# Altium PCB Snap4.PcbDoc
Units mil, origin at the board's own origin, x right, y up, seen from the top; angles counter-clockwise.
Board outline 4525 x 1525 mil, 4 copper layers (Top Layer, Internal Plane 1, Internal Plane 2, Bottom Layer), stack 30.634 mil thick; 67 components, 56 nets, 312 pads, 87 vias.
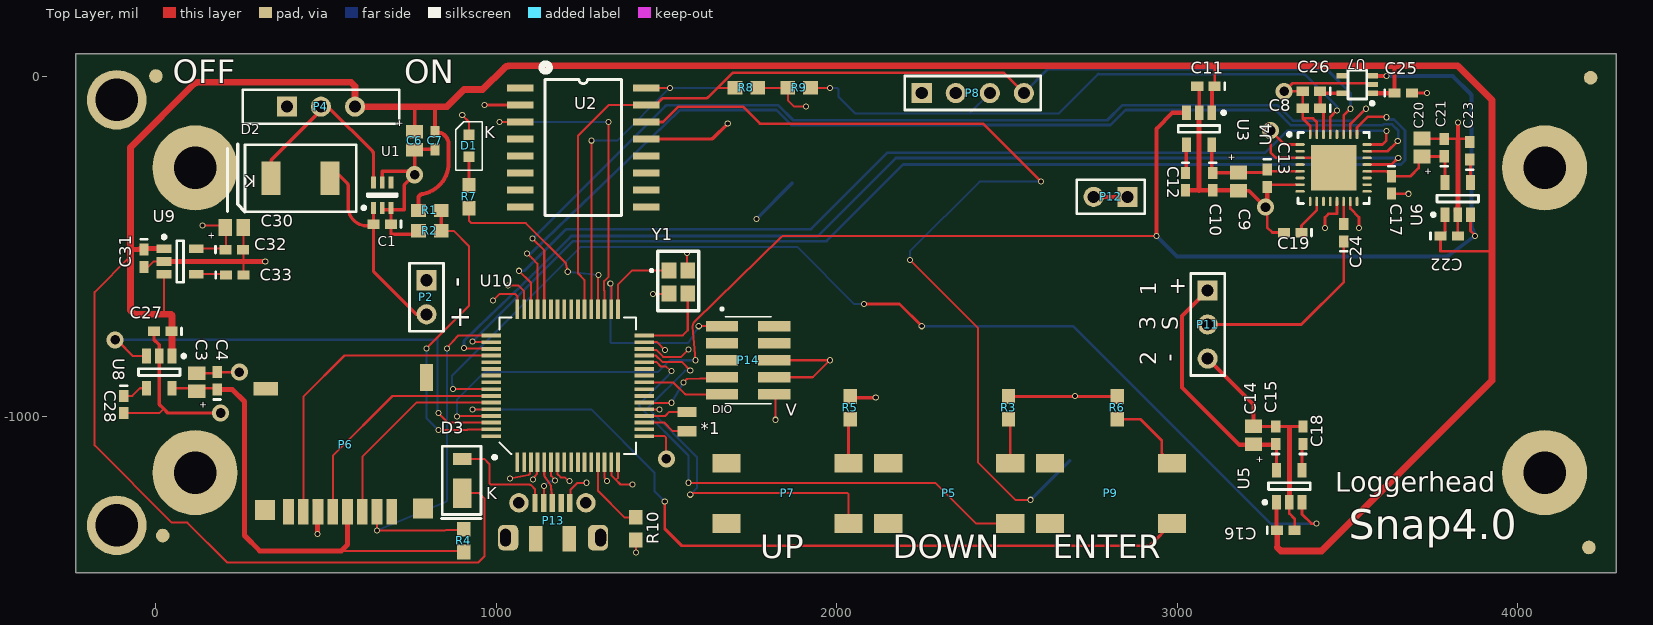
[diagram p0: Top Layer view]
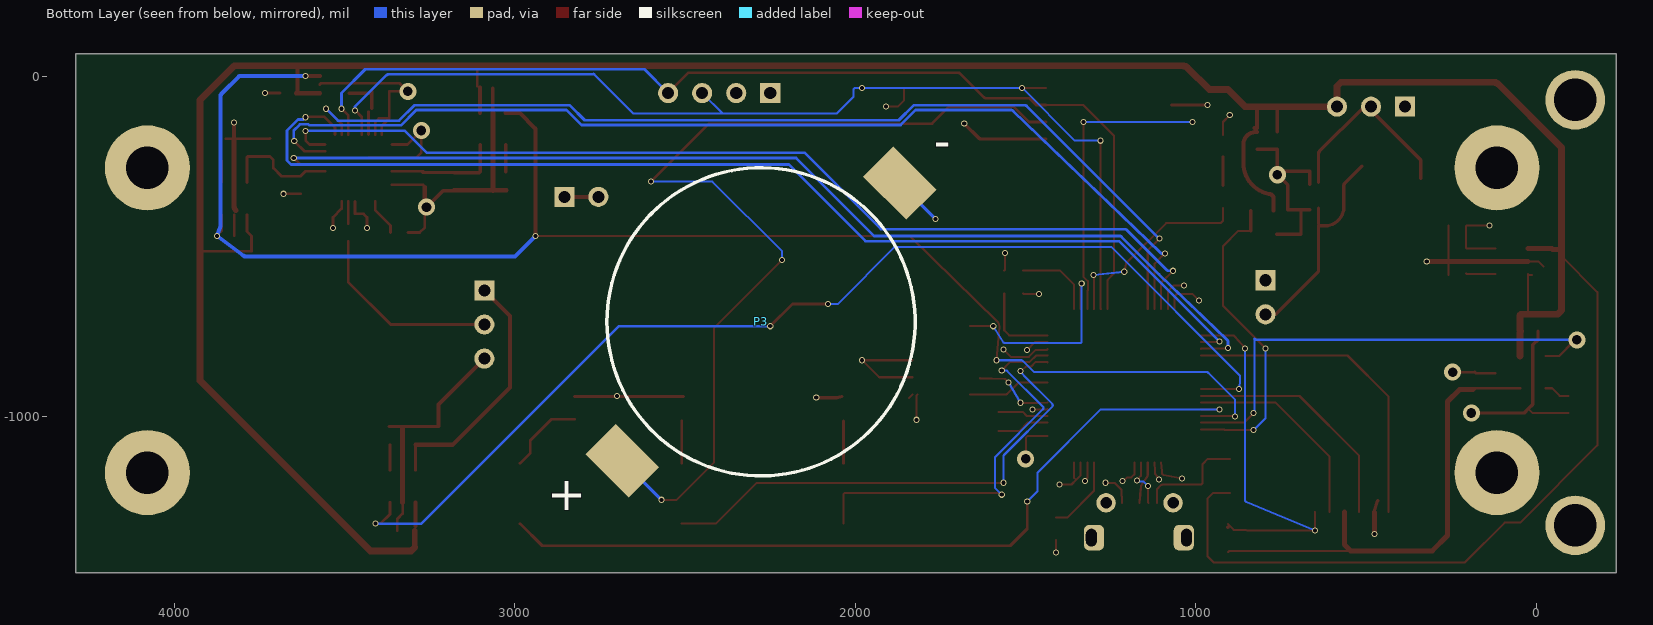
[diagram p1: Bottom Layer view, seen from below]
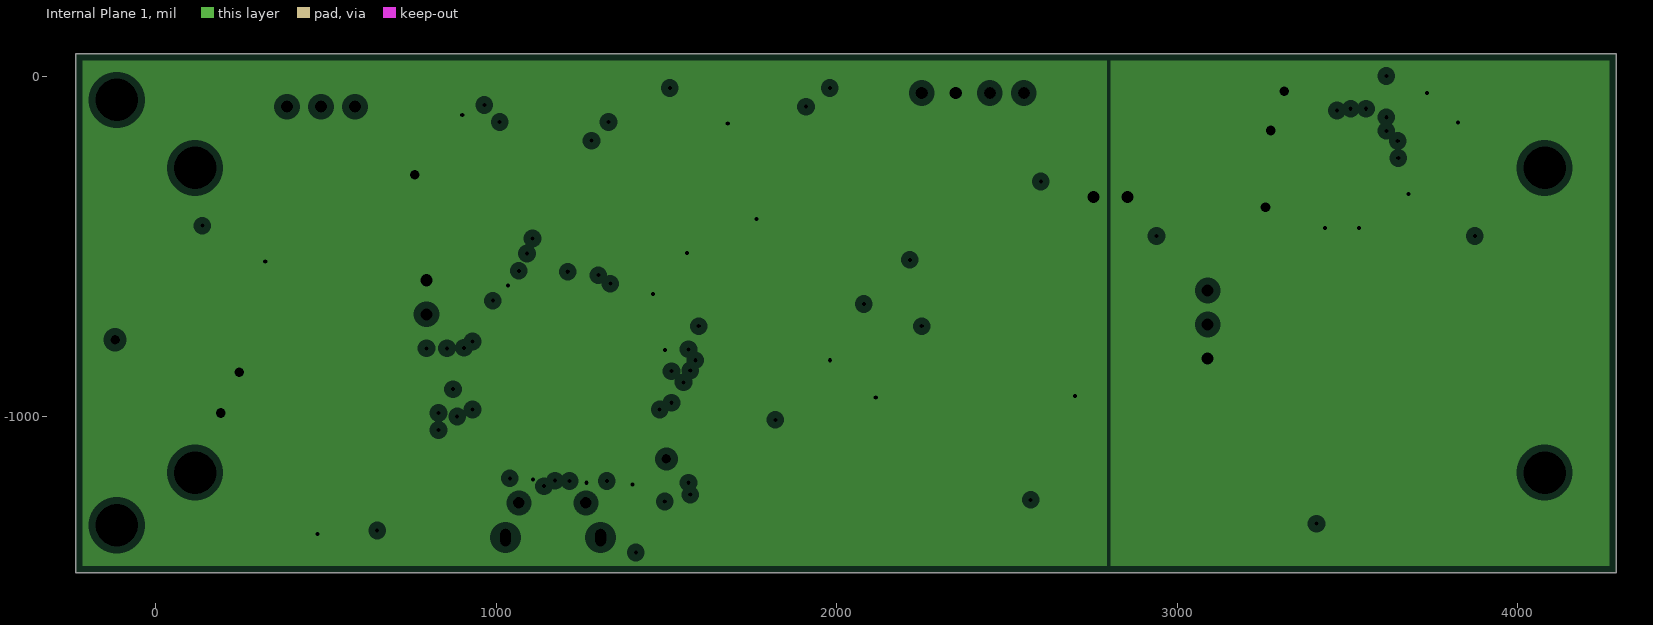
[diagram p2: Internal Plane 1, clearances drawn from the general rule]
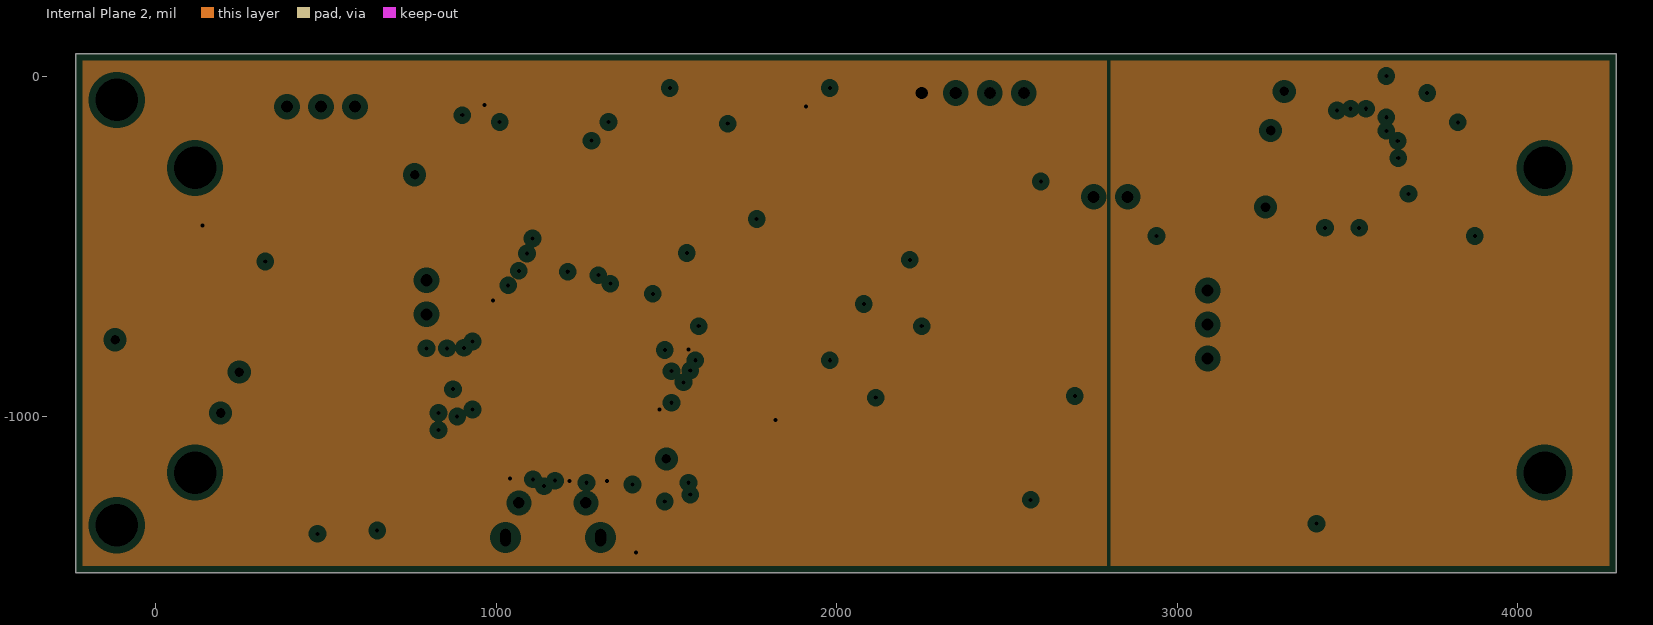
[diagram p3: Internal Plane 2, clearances drawn from the general rule]

## Layer stack, top to bottom
Top Solder: solder mask 0.4, Solder Resist, Dk 3.5
Top Layer: signal copper 1.4
Dielectric 1: core 10, FR-4, Dk 4.2
Internal Plane 1: plane copper 1.417, net (Multiple Nets)
Dielectric 3: prepreg 5, Dk 4.2
Internal Plane 2: plane copper 1.417, net (Multiple Nets)
Dielectric 2: core 10, Dk 4.2
Bottom Layer: signal copper 1.4
Bottom Solder: solder mask 0.4, Solder Resist, Dk 3.5

## Board outline
-235,-1460 -235,65 4290,65 4290,-1460

## Design rules (kind name [scope] priority, off if disabled: settings)
Clearance [All] p1: gap=6 ignorepadtopadclearanceinfootprint=FALSE except(0: Arc-Hole Track-Hole SMDPad-Hole THPad-Hole Via-Hole Fill-Hole Poly-Hole Region-Hole Text-Hole)
PlaneClearance [All] p1: clearance=20
PlaneConnect [All] p1: planeconnectstyle=Relief reliefexpansion=20 reliefentries=4 reliefconductorwidth=10 reliefairgap=10
PolygonConnect [All] p1: connectstyle=Relief reliefconductorwidth=10 reliefentries=4 polygonreliefangle="90 Angle" airgapwidth=10
RoutingVias [All] p1: holewidth=28 width=50 viastyle="Through Hole" minholewidth=10 minwidth=18 maxholewidth=28 maxwidth=50
SolderMaskExpansion [All] p1: expansion=4 istentingtop=FALSE
Width [All] p1: maxlimit=20 minlimit=6 preferedwidth=8
28 further rules are at their usual default settings.

## Classes and differential pairs
component class Snap4: *1 C1 C3 C4 C6 C7 C27 C28 C30 C31 C32 C33 D1 D2 D3 P2 P3 P4 P5 P6 P7 P8 P9 P13 P14 R1 R2 R3 R4 R5 R6 R7 R8 R9 R10 U1 U2 U8 U9 U10 Y1
component class Snap4_audio: C8 C9 C10 C11 C12 C13 C14 C15 C16 C17 C18 C19 C20 C21 C22 C23 C24 C25 C26 P11 P12 U3 U4 U5 U6 U7

## Components (designator, comment, footprint, x,y, rotation, side; value= is the part's Value field where it differs from the comment)
*1 "XTAL_ABS06" XTAL-ABS06 1560,-1015 r270 top
C1 "1uF" 0402 665,-435 r180 top value=0.1uF
C3 "10uF" Tant0805 120,-900 r270 top
C4 "2.2uF" 0402 180,-895 r90 top value=0.1uF
C6 "10uF" Tant0805 760,-190 r90 top
C7 "0.1uF" 0402 820,-190 r270 top
C8 "0.1uF" 0402 3395,-95 r180 top
C9 "10uF" Tant0805 3180,-310 r90 top
C10 "0.1uF" 0402 3105,-310 r270 top
C11 "1uF" 0402 3085,-30 r180 top value=0.1uF
C12 "0.01uF" 0402 3025,-310 r270 top value=0.1uF
C13 "0.1uF" 0402 3265,-300 r270 top
C14 "10uF" Tant0805 3225,-1055.16 r270 top
C15 "0.1uF" 0402 3290,-1055.16 r90 top
C16 "1uF" 0402 3320,-1335 r0 top value=0.1uF
C17 "0.1uF" 0402 3630,-320 r270 top
C18 "0.01uF" 0402 3370,-1055.16 r90 top value=0.1uF
C19 "0.1uF" 0402 3340,-460 r180 top
C20 "10uF" Tant0805 3720,-210 r270 top
C21 "0.1uF" 0402 3785,-210 r90 top
C22 "1uF" 0402 3800,-470 r0 top value=0.1uF
C23 "0.01uF" 0402 3860,-220 r90 top value=0.1uF
C24 "1.0uF" 0402 3490,-460 r90 top value=0.1uF
C25 "1.0uF" 0402 3665,-50 r0 top value=0.1uF
C26 "1.0uF" 0402 3395,-45 r180 top value=0.1uF
C27 "2.2uF" 0402 20,-750 r180 top value=0.1uF
C28 "0.01uF" 0402 -95,-965 r270 top value=0.1uF
C30 "10uF" Tant0805 230,-445 r180 top
C31 "2.2uF" 0402 -35,-535 r270 top value=0.1uF
C32 "2.2uF" 0402 230,-510 r0 top value=0.1uF
C33 "0.01uF" 0402 231.38,-584.66 r0 top value=0.1uF
D1 "LED_0603" Diode0603 920,-205 r90 top
D2 "PMEG3050EP*" Diode_PMEG3050EP 425,-300 r180 top
D3 "Shottky" DFLS130 900,-1189.96 r90 top
P2 "Header 2" HDR1X2 795,-600 r270 top
P3 "CoinCellHolder" CoinCellHolder 2685,-1130 r135 bottom
P4 "switch EG1218" HDR1X3 385,-90 r0 top
P5 "pushbutton" SOP4 2510,-1315 r180 top
P6 "microSD Hirose" "DM3D microSD" 630,-1155 r90 top
P7 "pushbutton" SOP4 2035,-1315 r180 top
P8 "Display" HDR1X4 2250,-50 r0 top
P9 "pushbutton" SOP4 2985,-1315 r180 top
P11 "HYDROPHONE" HDR1X3 3090,-630 r270 top
P12 "GND Tie" HDR1X2 2855,-355 r180 top
P13 "microUSB" microUSB-B 1165,-1305 r0 top
P14 "20021121-00010C4LF" AMPHENOL_20021121-00010C4LF 1740,-835 r270 top
R1 "200k .1%" 3-0603 805,-395 r180 top
R2 "68k 0.05%" 3-0603 805,-455 r0 top
R3 "10k" 3-0603 2505,-975 r90 top
R4 "10k" 3-0603 905,-1365 r90 top
R5 "10k" 3-0603 2040,-975 r90 top
R6 "10k" 3-0603 2825,-975 r90 top
R7 "330X" 3-0603 920,-355 r90 top
R8 "4.7k" 3-0603 1735,-35 r0 top
R9 "4.7k" 3-0603 1890,-35 r180 top
R10 "DNP" 3-0603 1410,-1330 r270 top
U1 "LM66100" SC-70-6 665,-350 r90 top
U2 "DS3231" DS3231 1071.1,-35 r0 top
U3 "LP3985IM5-3.3" MF05A_N 3065,-155 r270 top
U4 "SGTL5000" QFN32 3460,-270 r0 top
U5 "LP3985IM5-3.3" MF05A_N 3330,-1205.16 r90 top
U6 "LP3985IM5-3.3" MF05A_N 3825,-360 r90 top
U7 "TLV70018DCKR" TI-DCK5_V 3530,-25 r180 top
U8 "ADP1712AUJZ-3.3-R7" MF05A_N 10,-870 r270 top
U9 "ADP1712AUJZ-3.3-R7" MF05A_N 71.38,-544.66 r0 top
U10 "MK20DX256VLH7" QFP50P1200X1200X160-64N 1210,-910 r90 top
Y1 "FA-20H_16.0000MF10Z-AJ3" XTAL_FA-20H_16.0000MF10Z-AJ3 1535,-605 r0 top

## Footprints (in the part's own frame and the unit in brackets; to place one, negate y for a bottom-side part, rotate by r counter-clockwise, add the part's x,y. Pads: shape width x height; smd on the part's side, far side on the other; paste and mask are expansions set on the pad)
3-0603 [mm] "Chip Resistor; Body 1.6 x 0.9 mm (LxW typ)"
  rect 1.1x1 smd: 1(-0.85,0) 2(0.85,0)
0402 [mm] "Chip Capacitor; Body 1.0 x 0.5 mm (LxW typ)"
  rect 0.9x0.7 smd: 1(-0.65,0) 2(0.65,0)
  silkscreen extent -1.4,-0.25 -1.4,0.25
AMPHENOL_20021121-00010C4LF [mm]
  rect 0.76x2.4 smd: 1(-2.54,-1.95) 2(-2.54,1.95) 3(-1.27,-1.95) 4(-1.27,1.95) 5(0,-1.95) 6(0,1.95) 7(1.27,-1.95) 8(1.27,1.95) 9(2.54,-1.95) 10(2.54,1.95)
  silkscreen extent -3.92,-2.05 3.24,1.72, body extent -3.18,-2.75 3.18,2.75, height 4.55
CoinCellHolder [mm] "MPD BU2032SM-BT-GTR"
  rect 3.2x4.572 smd: 1(0,0) 2(29.3,0)
  silkscreen extent 3.15,-11.5 26.15,11.5
DFLS130 [mm] "Diode"
  rect 0.9x1.4 smd: A(1.65,0)
  rect 2.2x1.4 smd: K(-0.9,0)
  silkscreen extent -2.5,-1.4 2.6,1.5
Diode0603 [mm]
  rect 0.8x0.8 smd: A(-0.825,0) K(0.825,0)
  silkscreen extent -1.83,-1 1.8,1
Diode_PMEG3050EP [mm]
  rect 1.4x2.5 smd: A(-2.2,0) K(2.2,0)
  silkscreen extent -4.15,-2.5 5.45,2.5
"DM3D microSD" [mm] "MICROSD_HIROSE Push-Pull"
  rect 1.5x1.5 smd: 0(-3.048,7.874) 0(-2.921,-3.937)
  rect 1x1.85 smd: 0(6,7.8)
  rect 2x1 smd: 0(6.85,-4.191)
  rect 1.9x0.8 smd: 1(-3.188,-1.601) 2(-3.188,-0.501) 3(-3.188,0.599) 4(-3.188,1.699) 5(-3.188,2.799) 6(-3.188,3.899) 7(-3.188,4.999) 8(-3.188,6.099)
  body extent -3.65,-4.45 7.8,7.5, height 1.55
DS3231 [mm]
  rect 1.98x0.53 smd: 1(0,0) 2(0,-1.27) 3(0,-2.54) 4(0,-3.81) 5(0,-5.08) 6(0,-6.35) 7(0,-7.62) 8(0,-8.89) 9(9.37,-8.89) 10(9.37,-7.62) 11(9.37,-6.35) 12(9.37,-5.08) 13(9.37,-3.81) 14(9.37,-2.54) 15(9.37,-1.27) 16(9.37,0)
  silkscreen extent 1.83,-9.53 7.54,0.64
HDR1X2 [mm] "Connector; Header; 2 Position"
  rect 1.5x1.5 hole 0.9: 1(0,0)
  round 1.5 hole 0.9: 2(2.54,0)
  silkscreen extent -1.27,-1.27 3.81,1.27
HDR1X3 [mm] "Connector; Header; 3 Position"
  rect 1.5x1.5 hole 0.9: 1(0,0)
  round 1.5 hole 0.9: 2(2.54,0) 3(5.08,0)
  silkscreen extent -3.3,-1.27 8.38,1.27
HDR1X4 [mm] "Connector; Header; 4 Position"
  rect 1.5x1.5 hole 0.9: 1(0,0)
  round 1.5 hole 0.9: 2(2.54,0) 3(5.08,0) 4(7.62,0)
  silkscreen extent -1.27,-1.27 8.89,1.27
MF05A_N [mm] "SOT23, 5-Leads, Body 2.9x1.6mm, Pitch 0.95mm, Lead Span 2.8mm, IPC Medium Density"
  rect 1.1x0.65 smd: 1(-1.2,0.95) 2(-1.2,0) 3(-1.2,-0.95) 4(1.2,-0.95) 5(1.2,0.95)
  silkscreen extent -1.32,-1.55 0.25,1.95, body extent -0.9,-1.55 0.9,1.55, height 1.19
microUSB-B [mm]
  rect 0.4x1.35 smd: 1(-1.3,1.3) 2(-0.65,1.3) 3(0,1.3) 4(0.65,1.3) 5(1.3,1.3)
  rrect50% 1.5x1.9 hole 0.8 slot 1.3 at 90 deg copper offset 0.2,0: ""(-3.5,-1.3)
  round 1.45 hole 0.85: ""(-2.5,1.3) ""(2.5,1.3)
  rect 1x1.9 smd: ""(-1.25,-1.4) ""(1.25,-1.4)
  rrect50% 1.5x1.9 hole 0.8 slot 1.3 at 90 deg copper offset -0.2,0: ""(3.6,-1.3)
  body extent -4.1,-4.07 4.1,1.36, height 2.68
QFN32 [mm]
  oval 0.7x0.2 smd: 1(-2.5,1.75) 2(-2.5,1.25) 3(-2.5,0.75) 4(-2.5,0.25) 5(-2.5,-0.25) 6(-2.5,-0.75) 7(-2.5,-1.25) 8(-2.5,-1.75) 17(2.5,-1.75) 18(2.5,-1.25) 19(2.5,-0.75) 20(2.5,-0.25) 21(2.5,0.25) 22(2.5,0.75) 23(2.5,1.25) 24(2.5,1.75)
  oval 0.2x0.7 smd: 9(-1.75,-2.5) 10(-1.25,-2.5) 11(-0.75,-2.5) 12(-0.25,-2.5) 13(0.25,-2.5) 14(0.75,-2.5) 15(1.25,-2.5) 16(1.75,-2.5) 25(1.75,2.5) 26(1.25,2.5) 27(0.75,2.5) 28(0.25,2.5) 29(-0.25,2.5) 30(-0.75,2.5) 31(-1.25,2.5) 32(-1.75,2.5)
  rect 3.4x3.4 smd paste-1.2: 33(0,0)
  silkscreen extent -3.42,-2.65 2.65,2.65, body extent -2.5,-2.5 2.5,2.5, height 1
QFP50P1200X1200X160-64N [mil]
  rect 58x11 smd: 1(-225,148) 2(-225,128) 3(-225,108) 4(-225,89) 5(-225,69) 6(-225,49) 7(-225,30) 8(-225,10) 9(-225,-10) 10(-225,-30) 11(-225,-49) 12(-225,-69) 13(-225,-89) 14(-225,-108) 15(-225,-128) 16(-225,-148) 33(225,-148) 34(225,-128) 35(225,-108) 36(225,-89) 37(225,-69) 38(225,-49) 39(225,-30) 40(225,-10) 41(225,10) 42(225,30) 43(225,49) 44(225,69) 45(225,89) 46(225,108) 47(225,128) 48(225,148)
  rect 11x58 smd: 17(-148,-225) 18(-128,-225) 19(-108,-225) 20(-89,-225) 21(-69,-225) 22(-49,-225) 23(-30,-225) 24(-10,-225) 25(10,-225) 26(30,-225) 27(49,-225) 28(69,-225) 29(89,-225) 30(108,-225) 31(128,-225) 32(148,-225) 49(148,225) 50(128,225) 51(108,225) 52(89,225) 53(69,225) 54(49,225) 55(30,225) 56(10,225) 57(-10,225) 58(-30,225) 59(-49,225) 60(-69,225) 61(-89,225) 62(-108,225) 63(-128,225) 64(-148,225)
  silkscreen extent -201,-201 201,201
SC-70-6 [mm] "SOT23, 6-Leads, Body 2.00x2.10mm, Pitch 0.65mm, IPC Medium Density"
  rect 0.9x0.35 smd: 1(-0.95,0.65) 2(-0.95,0) 3(-0.95,-0.65) 4(0.95,-0.65) 5(0.95,0) 6(0.95,0.65)
  silkscreen extent -1.07,-1.1 0.1,1.5, body extent -0.7,-1.07 0.7,1.08, height 1.1
SOP4 [mm]
  rect 2.1x1.4 smd: 1(0,0) 2(0,-4.5) 3(9.1,-4.5) 4(9.1,0)
Tant0805 [mil]
  rect 40x50 smd: 1(-26.5,0) 2(26.5,0)
TI-DCK5_V [mm] "SOT23, 5-Leads, Body 2x1.25mm, Pitch 0.65mm"
  rect 0.9x0.4 smd: 1(-1.1,0.65) 2(-1.1,0) 3(-1.1,-0.65) 4(1.1,-0.65) 5(1.1,0.65)
  silkscreen extent -1.23,-1.07 0.7,1.52, body extent -0.63,-1 0.63,1, height 1.1
XTAL-ABS06 [mm]
  rect 0.75x1.4 smd: 1(-0.725,0) 2(0.725,0)
XTAL_FA-20H_16.0000MF10Z-AJ3 [mm]
  rect 1.1x1.2 smd mask+0.1: 1(-0.7,0.85) 2(-0.7,-0.85) 3(0.7,-0.85) 4(0.7,0.85)
  silkscreen extent -2.1,0.75 -1.9,0.95, body extent -1,-1.25 1,1.25, height 0.55

## Part data
*1: Supplier Part Number 1=535-10248-2-ND, Supplier 1=Digi-Key
C1 C4 C7 C8 C10 C11 C12 C13 C15 C16 C17 C18 C19 C21 C22 C23 C24 C25 C26 C27 C28 C31 C32 C33: library part C0402, "Ceramic Chip Capacitor - Standard", PackageDocument=Mar-2001, Code_IPC="1005 [0402]", Code_JEITA=0402, ComponentLink1Description="Manufacturer Link", ComponentLink1URL=http://www.kemet.com/, ComponentLink2Description=Datasheet, ComponentLink2URL=http://www.kemet.com/kemet/web/homepage/kechome.nsf/vapubfilesname/F3102TA.pdf/$file/F3102TA.pdf, DatasheetDocument=Mar-2001, LatestRevisionDate=19-Mar-2004, LatestRevisionNote="Silkscreen size reduced.", Note="Footprint corresponds to dimensions for bulk cassette packaging. This case size has tightened tolerances.", PackageReference=0402, Published=17-Jul-2002, Publisher="Altium Limited"
C3 C6 C9 C14 C20 C30: library part Tant0805
D2: library part Diode_PMEG3050EP
D3: library part DFLS130, Supplier Part Number 1=DFLS130LDITR-ND, Supplier 1=Digi-Key
P2: "Header, 2-Pin", LatestRevisionDate=17-Jul-2002, LatestRevisionNote="Re-released for DXP Platform.", Publisher="Altium Limited"
P3: Supplier Part Number 1=BU2032SM-BT-GCT-ND, Supplier 1=Digi-Key
P4 P11: library part "Header 3", "Header, 3-Pin", LatestRevisionDate=17-Jul-2002, LatestRevisionNote="Re-released for DXP Platform.", Publisher="Altium Limited"
P5 P7 P9: Supplier Part Number 1=450-1757-2-ND, Supplier 1=Digi-Key
P6: Supplier Part Number 1=HR1941DKR-ND, Supplier 1=Digi-Key
P8: library part "Header 4", "Header, 4-Pin", LatestRevisionDate=17-Jul-2002, LatestRevisionNote="Re-released for DXP Platform.", Publisher="Altium Limited"
P12: library part "Header 2", "Header, 2-Pin", LatestRevisionDate=17-Jul-2002, LatestRevisionNote="Re-released for DXP Platform.", Publisher="Altium Limited"
P13: library part microUSB-B, Supplier Part Number 1=WM1399TR-ND, Supplier 1=Digi-Key
P14: "Conn Rect BrdtoBrd UnshroudedHeader 10Cnts SMT 1.27x1.27mmSpng", Package=None, Check_prices=https://www.snapeda.com/parts/20021121-00010C4LF/Amphenol+FCI/view-part/?ref=eda, MF="Amphenol ICC", MP=20021121-00010C4LF, SnapEDA_Link=https://www.snapeda.com/parts/20021121-00010C4LF/Amphenol+FCI/view-part/?ref=snap
R1 R2 R3 R4 R5 R6 R7 R8 R9 R10: library part ERJ3RK, "Precision Thick Film Chip Resistor, 10 Ohm to 1M Ohm Range, 1% and 0.5% Tolerance, 0603 Size, 0.063 W", PackageDocument=Mar-2003, Code_IPC="1608 [0603]", ComponentLink1Description="Manufacturer Link", ComponentLink1URL=http://www.panasonic.com/industrial/components/resistive_products.htm, ComponentLink2Description=Datasheet, ComponentLink2URL=http://www.panasonic.com/industrial/components/pdf/AOA0000CE2.pdf, LatestRevisionDate=19-Mar-2004, LatestRevisionNote="Silkscreen size reduced.", PackageReference=3-0603, Published=17-Dec-2003, Publisher="Altium Limited"
U2: Supplier Part Number 1=DS3231S#-ND, Supplier 1=Digi-Key
U3 U5 U6: "Micropower, 150mA Low-Noise Ultra Low-Dropout CMOS Voltage Regulator", DigiKeyPartNumber=LP3985IM5-3.3CT-ND, Manufacturer="National Semiconductor", PackageTopMarking=LDQB*XTT, PowerWise=N, ComponentLink1Description="LP3985 Datasheet", ComponentLink1URL=http://www.national.com/ds/LP/LP3985.pdf, ComponentLink2Description="LP3985 Web Page", ComponentLink2URL=http://www.national.com/pf/LP/LP3985.html, ComponentLink3Description="MF05A Package Page", ComponentLink3URL=http://www.national.com/packaging/folders/mf05a.html, CompType="LDO IC", DatasheetVersion=Aug-2005, PackageDescription="Molded SOT-23, .115 x .063 x .040 in Body, 5 Lead, .0375 in Pitch", PackageReference=MF05A, PackageVersion="revD, Aug-2008", PartNumber=LP3985IM5-3.3, PinCount=5, Published=4-Dec-2008, Publisher="Altium Limited", RoHS=O
U7: "Single Output LDO, 200 mA, Fixed 1.8 V Output, 2 to 5.5 V Input, with Low IQ, 5-pin SC70 (DCK), -40 to 125 degC, Green (RoHS & no Sb/Br)", Manufacturer="Texas Instruments", Supplier Part Number 1=296-32409-2-ND, Accuracy(%)=2, Code_JEDEC=MO-203, ComponentLink1Description="Manufacturer URL", ComponentLink1URL=http://www.ti.com/, ComponentLink2Description=Datasheet, ComponentLink2URL=http://www.ti.com/general/docs/lit/getliterature.tsp?genericPartNumber=TLV70018&fileType=pdf, ComponentLink3Description="Package Specification", ComponentLink3URL=http://www.ti.com/litv/pdf/mpds025f, DatasheetVersion=SLVSA00D, Eco-Plan="Green (RoHS & no Sb/Br)", Fixed Output Options(V)=1.8, Iout(Max)(A)=0.2, Iq(Typ)(mA)=0.03, Mounting Technology="Surface Mount", PackageDescription="5-Pin Plastic Small-Outline, Body 2 x 1.25 mm, Pitch 0.65 mm", PackageReference=DCK5, PackageVersion=4093553-3/G, PartNumber=TLV70018DCKR, SubFamily="Single Channel LDO", Supplier 1=Digi-Key, Supplier 2=Digi-Key, Supplier 3=Digi-Key, Supplier 4=Newark, Supplier 5=Mouser, Supplier Part Number 2=296-32409-1-ND, Supplier Part Number 3=296-32409-6-ND, Supplier Part Number 4=55R7461, Supplier Part Number 5=595-TLV70018DCKR, Vdo(Typ)(mV)=175, Vin(Max)(V)=5.5, Vin(Min)(V)=2, Vout Adj(Max)(V)=1.8, Vout Adj(Min)(V)=1.8
U8 U9: library part LP3985IM5-3.3, "Micropower, 150mA Low-Noise Ultra Low-Dropout CMOS Voltage Regulator", DigiKeyPartNumber=LP3985IM5-3.3CT-ND, Manufacturer="National Semiconductor", PackageTopMarking=LDQB*XTT, PowerWise=N, ComponentLink1Description="LP3985 Datasheet", ComponentLink1URL=http://www.national.com/ds/LP/LP3985.pdf, ComponentLink2Description="LP3985 Web Page", ComponentLink2URL=http://www.national.com/pf/LP/LP3985.html, ComponentLink3Description="MF05A Package Page", ComponentLink3URL=http://www.national.com/packaging/folders/mf05a.html, CompType="LDO IC", DatasheetVersion=Aug-2005, PackageDescription="Molded SOT-23, .115 x .063 x .040 in Body, 5 Lead, .0375 in Pitch", PackageReference=MF05A, PackageVersion="revD, Aug-2008", PartNumber=LP3985IM5-3.3, PinCount=5, Published=4-Dec-2008, Publisher="Altium Limited", RoHS=O
U10: "ARMÂ®CortexÂ®-M4Kinetis K20å¾®æŽ§åˆ¶å™¨IC 32ä½72MHz 256KBï¼ˆ256K x 8ï¼‰FLASH 64-LQFPï¼ˆ10x10ï¼‰", Package="LQFP-64 NXP Semiconductors", Availability=Unavailable, MF="NXP USA", MP=MK20DX256VLH7, Price=None, SnapEDA_Link=https://www.snapeda.com/parts/MK20DX256VLH7/NXP%20USA%20Inc./view-part/625714/?ref=snap
Y1: "16 MHz ±10ppm Crystal 8pF 80 Ohms 4-SMD, No Lead", Package="NON STANDARD-4 EPSON", Check_prices=https://www.snapeda.com/parts/FA-20H%2016.0000MF10Z-AJ3/EPSON/view-part/?ref=eda, MF=EPSON, MP="FA-20H 16.0000MF10Z-AJ3", SnapEDA_Link=https://www.snapeda.com/parts/FA-20H%2016.0000MF10Z-AJ3/EPSON/view-part/?ref=snap

## Free pads (board coordinates)
  round 175 hole 125: 0(-115,-1320) 0(-115,-70)
  round 40 smd paste-20 mask+5: 0(0,0) 0(20,-1350) 0(4210,-1385) 0(4215,-5)
  round 250 hole 125: 0(115,-270) 1(4080,-270) 2(4080,-1165) 3(115,-1165)

## Via types
v1: diameter 18, hole 12, Top Layer to Bottom Layer, tented both sides, 79 vias
v2: diameter 50, hole 28, Top Layer to Bottom Layer, tented both sides, 6 vias
v3: diameter 50, hole 28, Top Layer to Bottom Layer, 2 vias

## Nets (pads, with @x,y where several pads share a name; then routed paths per layer and width w, separated by ;. In a path a pad name is that pad's centre, name@x,y a point inside that pad or via, vN(x,y) a via of type N, cw(c..) or ccw(c..) an arc to the next point about the centre after c; other vN are vias at no path point)
AGND: C8.2 C9.1 C10.2 C11.2 C12.2 C13.2 C14.1 C15.2 C16.2 C17.2 C18.2 C19.2 C20.1 C21.2 C22.2 C23.2 C25.2 C26.2 P11.3 P12.1 U3.2 U4.1 U4.3 U4.7 U4.13 U4.15 U4.31 U4.32 U4.33 U5.2 U6.2 U7.2 | length 3159.2
  Top Layer w8: C14.1 3225.91,-1029.57 C15.2 3324.57,-1029.57 ; v2(3260,-385) 3265,-380 3265,-445 3280,-460 C19.2 ; C13.2@3270,-319.21 U4.7 ; U5.2 3330,-1285 3345.59,-1300.59 C16.2 ; 3330,-1035 3324.57,-1029.57 ; U4.1 3316.1,-201.1 v2(3275,-160) 3275,-224.41 3291.06,-240.47 U4.3 U4.33@3430.47,-240.47 ; C18.2 3324.57,-1029.57 ; U4.32 3391.1,-146.1 3369.41,-124.41 ; U4.31 3410.79,-135.79 3399.41,-124.41 3369.41,-124.41 ; v1@3435,-445 3435,-415 3445.16,-404.84 3469.84,-404.84 U4.13 ; U4.15 3509.21,-389.21 3535,-415 v1@3535,-450 ; U7.2 3569.53,-21.22 3338.78,-21.22 v2(3315,-45) C26.2 C8.2 3369.41,-124.41 ; C17.2 v1@3679.41,-345.59 ; C25.2 v1(3735,-50) ; C20.1 3720.91,-184.41 C21.2 3825,-184.41 C23.2@3850,-184.41 ; C22.2@3825,-469.41 U6.2
  Top Layer w10: U3.2 C11.2@3065,-35.59 ; C9.1 3211.5,-336.5 v2(3260,-385)
  Top Layer w12: C12.2 3065,-335.59 C10.2 C9.1@3179.09,-335.59 ; P11.3 3225,-965 C14.1 ; v2@3265,-380 C13.2 ; 3825,-184.41 v1@3825,-135
  Top Layer w15: 3065,-335.59 U3.2 ; U5.2 3330,-1035 ; U6.2@3820,-395 3820.61,-394.39 ccw(c3810,-383.79) 3825,-383.79 3825,-184.41
  other v1: 3435,-446 3535,-446 3680,-346 3825,-136
BATT_BACK: P3.1 U2.14 | length 2805.7
  Top Layer w6: v1(2215,-540) 2415,-740 2415,-1135 2525,-1245 v1(2570,-1245)
  Top Layer w8: U2.14 1490,-135 1535,-90 1725,-90 1775,-140 2430,-140 v1(2600,-310)
  Bottom Layer w6: v1(2215,-540) 2215,-515 2420,-310 v1(2600,-310)
  Bottom Layer w10: v1(2570,-1245) P3.1
BCLK: U4.24 U10.46 | length 2934.9
  Top Layer w6: v1@1065,-570 1102,-607 U10.46
  Top Layer w8: U4.24 3603.9,-201.1 3615,-190 v1@3615,-165
  Bottom Layer w8: v1(1066.26,-572.23) 1079.46,-572.23 ccw(c1079.46,-564.23) 1085.1,-569.9 1202.67,-452.33 cw(c1208.31,-458) 1208.27,-450 ; 1208.31,-450 1925,-450 2150,-225 3259.5,-225 3323.5,-161 v1(3615,-161)
CS1: P6.2 R4.2 U10.49 | length 1136.2
  Top Layer w6: P6.2 650,-1280.79 v1(650,-1335) 847.52,-1335 ccw(c847.52,-1329) 849.58,-1334.64 852.06,-1333.73 cw(c854.11,-1339.37) 854.08,-1333.37 885.69,-1333.37 888.31,-1333.36 R4.2@905,-1316.54 ; v1(855,-800) 885.95,-764.1 cw(c890.51,-768) 890.51,-762 U10.49
  Top Layer w10: R4.2@905,-1325 R4.2@906,-1326
  Bottom Layer w6: v1(650,-1335) 851.32,-1251.36 ccw(c849,-1245.82) 855,-1245.82 v1(855,-800)
D+: P13.3 U10.5 | length 124.8
  Top Layer w6: U10.5 1141,-1172.03 ccw(c1147,-1172.03) 1141.99,-1175.33 1160.08,-1202.75 cw(c1155.07,-1206.05) 1161.05,-1205.56 1163.02,-1229.68 cw(c1157.04,-1230.15) 1163.04,-1230.15 1163.04,-1230.24 P13.3
D-: P13.2 U10.6 | length 146.3
  Top Layer w6: P13.2 1139.7,-1253.52 1139.7,-1205.3 v1(1140,-1205) ; U10.6 1161,-1174.64 1170.44,-1184.09 cw(c1166.17,-1188.3) 1172.04,-1187.03 v1(1172.41,-1188.76)
  Bottom Layer w6: v1(1140,-1205) 1154.2,-1190.8 1170.3,-1190.8 1171.82,-1189.28 cw(c1176.06,-1193.52) v1(1172.41,-1188.76)
DGND: C1.1 C3.1 C4.2 C6.1 C7.2 C27.2 C28.2 C30.1 C31.2 C32.2 C33.2 D1.K P2.1 P3.2 P6.6 P8.2 P12.2 P13.5 P14.6 P14.8 R2.1 R3.2 R5.2 R6.2 U1.2 U1.3 U1.5 U2.13 U8.2 U9.2 U10.4 U10.15 U10.16 U10.31 U10.47 Y1.2 Y1.4 | length 3624.4
  Top Layer w6: C28.2 9.41,-990.59 22.5,-977.5 ; C31.2@-22.13,-560.25 -6.54,-544.66 U9.2 ; C33.2 257.88,-583.75 257.88,-544.66 C30.1@257.88,-439.66 ; P6.6@475,-1282.01 P6.6 ; v1(900,-115) 920,-135 D1.K ; v1(1035,-615) 1065,-615 1082,-632 U10.47 ; v1(1108.12,-1185.03) 1109.53,-1181.96 cw(c1114.98,-1184.46) 1110.09,-1180.99 1110.13,-1180.94 1113.84,-1175.89 1118.66,-1169.34 ccw(c1113.82,-1165.79) 1119.82,-1165.79 1119.82,-1161 U10.4 ; P13.5 1216.18,-1237.57 cw(c1222.18,-1237.6) 1216.58,-1235.45 1217.49,-1233.07 ccw(c1211.9,-1230.92) 1217.9,-1230.95 1217.9,-1218.1 cw(c1223.9,-1218.1) 1219.63,-1213.88 1234.99,-1198.52 ; 1235.03,-1198.49 1238.51,-1195 v1(1265,-1195) ; U10.15 1338,-1173 1351.5,-1186.5 ; U10.16 1358,-1180 1351.5,-1186.5 ; v1(1400,-1200) 1365,-1200 1351.5,-1186.5 ; U10.31 1472.46,-782 v1(1495.23,-804.77) ; v1(1460,-640) 1505.91,-640 Y1.2 ; v1(1560,-520) 1560,-568.98 Y1.4 ; P14.8@1831.77,-885 1927.51,-885 ccw(c1927.51,-879) 1931.76,-883.24 v1(1980,-835) P14.6@1831.77,-835
  Top Layer w8: C3.1 175.91,-873.5 C4.2 180.59,-870 v2(245,-870)
  Top Layer w10: C27.2 -5.59,-774.41 10,-790 U8.2 10,-965 22.5,-977.5 35,-990 v2(190,-990) ; P6.6@465.75,-1248.11 P6.6 ; U1.2@665,-392.4 U1.3@690.59,-392.4 ; U1.5@665,-317.6 U1.5 665,-280 750,-280 v3(760,-290) ; C6.1 v3(760,-290) ; C6.1@760.91,-215.59 C7.2 ; R2.1@761.54,-465 690.59,-465 C1.1 U1.3@690.59,-392.4 ; U2.13 1630.86,-185 ccw(c1630.86,-175) 1637.93,-182.07 v1(1680,-140) ; R5.2 2054.69,-945 v1(2115,-945) ; R3.2 R6.2 ; U1.3@690.59,-392.4 730,-392.4 730,-320 v3(760,-290)
  Top Layer w15: U9.2 257.88,-544.66 v1(321.38,-544.66) ; v1(475,-1345) P6.6@475,-1282.01
  Bottom Layer w10: v1(1765,-420) 1765,-418.64 P3.2
  other v1: 2700,-940
DN-TX: P5.1 U10.28 | length 1511.3
  Top Layer w6: U10.28 1436,-840 1470,-840 1483.85,-853.85 1498.45,-853.85 1500.08,-855.14 v1(1515,-867) ; v1(1565,-1195) 2290,-1195 2410,-1315 P5.1
  Bottom Layer w6: 1501.65,-883.35 1421.74,-963.26 ccw(c1425.99,-967.5) 1421.75,-971.75 1563.26,-1113.26 cw(c1559,-1117.49) 1565,-1117.49 v1(1565,-1195) ; 1501.67,-883.32 ccw(c1497.38,-879.13) 1502.04,-882.92 v1(1515,-867)
ENT-RST: P9.1 U10.60 | length 2382.1
  Top Layer w6: v1(930,-980) 930.5,-979.5 984.5,-979.5 U10.60
  Top Layer w8: v1(1495,-1250) 1495,-1330 1545,-1380 2920,-1380 P9.1
  Bottom Layer w6: v1(930,-980) 1280,-980 1465,-1165 1465,-1220 v1(1495,-1250)
HYDRO_EN: U5.3 U10.57 | length 3274.6
  Top Layer w6: v1(873,-920) U10.57
  Top Layer w8: v1(2080,-670) 2185,-670 v1(2250,-735) ; U5.3 3367.4,-1287.4 3395,-1315 v1(3410,-1315)
  Bottom Layer w6: v1(873,-920) 870.06,-899.87 cw(c876,-899) 870,-899 870,-880 1248,-502 1884,-502 2052,-670 v1(2080,-670)
  Bottom Layer w8: v1(2250,-735) 2695,-735 3275,-1315 v1(3410,-1315)
I2SDIN: U4.26 U10.44 | length 2996.9
  Top Layer w6: v1(1106.26,-477.23) 1141,-511.97 U10.44
  Top Layer w8: U4.26 3509.21,-140.79 v1@3555,-95
  Bottom Layer w8: v1@1107.33,-477.67 1496.67,-88.33 cw(c1502.31,-94) 1502.27,-86 ; 1502.31,-86 1828.63,-86 1872.63,-130 2795,-130 2839,-86 3296,-86 3341,-131 3520,-131 v1(3555,-96)
I2SDOUT: U4.25 U10.50 | length 3294.6
  Top Layer w6: v1(930,-780) 931,-781 984,-781 U10.50
  Top Layer w8: U4.25 3528.9,-151.1 3560,-120 v1@3615,-120
  Bottom Layer w8: v1(930,-780) 1225,-485 1970,-485 2195,-260 3657.87,-260 3670,-247.87 3670,-160.2 3637.8,-128 3622,-128 v1(3615,-121)
IN_L: C24.2 U4.14 | length 65.5
  Top Layer w8: C24.2@3489.53,-433.94 U4.14
INT: U2.3 U10.35 | length 936.9
  Top Layer w6: v1(1010,-135) U2.3 ; U10.35 1318,-631.27 1317,-630.27 1317,-602.54 1330,-589.54 v1(1330,-135)
  Bottom Layer w6: v1(1010,-135) v1(1330,-135)
LED1: R7.1 U10.36 | length 589.4
  Top Layer w6: R7.1 920,-425 927.23,-432.23 1086.71,-432.23 1203.72,-549.24 ; 1203.74,-549.26 cw(c1199.48,-553.48) 1205.36,-552.28 v1(1210,-575) ; U10.36 1299.5,-684.5 1299.5,-585.5 v1(1300,-585)
  Bottom Layer w6: v1(1210,-575) v1(1300,-585)
LRCLK: U4.23 U10.45 | length 3098.4
  Top Layer w6: v1(1090.32,-521.29) 1105.51,-535.52 cw(c1101.41,-539.9) 1105.64,-535.64 1121,-551 U10.45
  Top Layer w8: U4.23 3619.21,-220.79 v1@3645,-195
  Bottom Layer w8: v1(1090.32,-521.29) 1097.73,-521.44 ccw(c1097.88,-513.44) 1103.43,-519.21 1537.07,-102.22 cw(c1542.6,-108) 1542.56,-100 ; 1542.6,-100 1822.83,-100 1866.83,-144 2804.75,-144 2848.75,-100 3290,-100 3335,-145 3604.13,-145 3607.13,-142 3632,-142 3650,-160 3650,-189.58 v1(3648.43,-191.16)
MCLK: U4.21 U10.51 | length 3166.8
  Top Layer w6: v1(905,-798.66) 906.67,-800.33 983.33,-800.33 U10.51
  Top Layer w8: U4.21 3629.84,-260.16 v1@3650,-240
  Bottom Layer w8: v1(905,-798.66) 905,-781.11 cw(c913,-781.11) 907.45,-775.35 1107.26,-582.74 cw(c1112.84,-588.47) 1107.34,-582.65 ccw(c1097.6,-572.6) 1107.47,-582.53 1217.67,-472.33 cw(c1223.31,-478) 1223.31,-470 1945,-470 2174,-241 v1(3650,-241)
MISO: P6.7 U10.52 | length 940.6
  Top Layer w6: P6.7 433.19,-941.81 554,-821 U10.52
MOSI: P6.3 U10.59 | length 606.6
  Top Layer w6: P6.3 606.42,-1118.58 766,-959 U10.59
Net*1_1: *1.1 U10.20 | length 149.9
  Top Layer w6: U10.20 1493.51,-999 ccw(c1493.51,-993) 1497.74,-997.26 1508.54,-986.46 1543.54,-986.46 *1.1 *1.1@1580,-986.46
Net*1_2: *1.2 U10.19 | length 155.6
  Top Layer w6: U10.19 1493,-1018 1518.54,-1043.54 *1.2@1580,-1043.54
NetC12_1: C12.1 U3.4 | length 79.6
  Top Layer w10: C12.1@3027.6,-281.81 U3.4
NetC18_1: C18.1 U5.4 | length 74.6
  Top Layer w8: U5.4 C18.1@3367.4,-1083.35
NetC19_1: C19.1 U4.10 | length 110.3
  Top Layer w8: C19.1 3365.59,-439.41 3410.79,-394.21 U4.10
NetC23_1: C23.1 U6.4 | length 64.8
  Top Layer w8: U6.4 C23.1@3862.4,-247.99
NetC24_1: C24.1 P11.2 | length 571.2
  Top Layer w8: P11.2 3365,-730 3490,-605 C24.1
NetC28_1: C28.1 U8.4 | length 76.8
  Top Layer w6: C28.1 -69.41,-939.41 -47.24,-917.24 U8.4
NetC33_1: C33.1 U9.4 | length 88.2
  Top Layer w6: U9.4 203.39,-582.06 C33.1@205.79,-579.66
NetD1_A: D1.A R7.2 | length 84.1
  Top Layer w8: R7.2 D1.A
NetP5_2: P5.2 R3.1 | length 124.4
  Top Layer w8: P5.2 R3.1@2510,-1013.46
NetP7_2: P7.2 R5.1 | length 124.4
  Top Layer w8: P7.2 R5.1@2035,-1013.46
NetP9_2: P9.2 R6.1 | length 235.7
  Top Layer w8: R6.1 2893.46,-1008.46 2955,-1070 2955,-1107.83 P9.2
NetR10_1: R10.1 U10.13 | length 227.1
  Top Layer w6: U10.13 1299,-1219 1376.54,-1296.54 R10.1
NetU10_32: U10.32 Y1.3 | length 242.6
  Top Layer w6: U10.32 1548,-762 1562.56,-747.44 Y1.3
NetU10_33: U10.33 Y1.1 | length 239.2
  Top Layer w6: U10.33 1358,-612 1398.46,-571.54 Y1.1
POW: D2.K P4.2 U1.6 | length 568.2
  Top Layer w8: P4.2@485,-100 P4.2
  Top Layer w10: D2.K 338.39,-246.61 P4.2@485,-100 ; P4.2 500.86,-90 cw(c500.86,-100) 507.88,-92.88 636.5,-221.5 cw(c629.41,-228.55) 639.41,-228.51 ; U1.6 639.41,-228.55
POW1: U8.3 U10.62 | length 1450.4
  Top Layer w6: v2@-110,-780 -67.24,-822.76 U8.3 ; v1(830,-990) 858,-1018 U10.62
  Top Layer w8: v2(-120,-775) -115,-775 v2@-110,-780
  Bottom Layer w6: 827.34,-772.66 827.34,-992.34 v1@830,-995
  Bottom Layer w8: v2(-120,-775) 821.73,-775 ccw(c821.69,-767) 827.34,-772.66
RESET: P14.1 U10.34 | length 600.9
  Top Layer w6: U10.34 v1@1338,-612 ; v1(1595,-735) P14.1
  Bottom Layer w6: v1(1335,-610) 1335,-781.49 1336.76,-783.24 ccw(c1341,-779) 1341,-785 1560.21,-785 ccw(c1560.21,-779) 1565.28,-782.2 v1(1595,-735)
SCK: P6.5 U10.58 | length 703.1
  Top Layer w6: P6.5 519.8,-1115.2 695,-940 U10.58
SCL: P8.3 R9.1 U2.16 U4.29 U10.37 | length 3184.9
  Top Layer w6: U10.37 1279.5,-684.5 1279.5,-620.5 1280,-620 v1(1280,-190) ; U2.16 v1(1510,-35) ; R9.1 v1(1980,-35)
  Top Layer w8: U4.29 3450.16,-119.84 v1@3470,-100
  Bottom Layer w6: v1(1280,-190) 1355,-190 v1(1510,-35) v1(1980,-35) 2001.49,-35 2005,-38.51 2005,-60 2055,-110 2390,-110 ; P8.3 2390,-110 ; 2770,7 2768,5 2653,-110 2390,-110
  Bottom Layer w8: 2768,5 3371.69,5 cw(c3371.69,-3) 3377.34,2.66 3470,-90 v1(3470,-101)
SDA: P8.4 R8.1 U2.15 U4.27 U10.38 | length 3121.3
  Top Layer w6: U10.38 1259,-601.49 ccw(c1253,-601.49) 1257.27,-597.27 1241.75,-581.75 cw(c1246,-577.51) 1240,-577.51 1240,-175 1330,-85 U2.15 ; 1650,-35 R8.1
  Top Layer w8: U2.15 1468.54,-85 1486.2,-67.34 cw(c1491.86,-73) 1491.86,-65 1616.69,-65 ccw(c1616.69,-57) 1622.34,-62.66 1650,-35 1692.67,7.67 cw(c1698.31,2) 1698.27,10 ; 1698.31,10 2490,10 P8.4 ; U4.27 3489.53,-115.47 v1@3505,-100
  Bottom Layer w8: P8.4 2620,20 3440,20 3510,-50 v1(3510,-96)
SGTL_EN: U3.3 U6.3 U7.3 U10.61 | length 4671.5
  Top Layer w6: v1(885,-1000) cw(c888.32,-1005) 888.28,-999 U10.61 ; v1(1585,-835) 1582.97,-801.9 ccw(c1565,-803) 1582.93,-801.38 1577.07,-736.62 cw(c1595,-735) 1582.41,-722.13 1836.45,-473.55 ccw(c1832.26,-469.26) 1836.52,-473.48 cw(c1844.97,-482) 1844.92,-470 ; 1844.97,-470 v1(2940,-470)
  Top Layer w8: U6.3 3862.4,-454.7 3875,-467.29 v1(3875,-470)
  Top Layer w12: v1(2940,-470) 2940,-155 2987.24,-107.76 U3.3 ; U7.3 v1@3614.41,0.59
  Bottom Layer w6: v1(885,-1000) 885,-950 963.24,-871.76 cw(c967.49,-876) 967.49,-870 1475,-870 1508.24,-836.76 cw(c1512.49,-841) 1512.49,-835 v1(1585,-835)
  Bottom Layer w12: v1(2940,-470) 3000,-530 3790.85,-530 ccw(c3790.85,-518) 3798.2,-527.49 cw(c3805.55,-536.97) 3798.38,-527.35 v1(3875,-470) 3865.6,-441.53 cw(c3877,-437.78) 3865,-437.83 3864.97,-59.94 ccw(c3852.97,-59.94) 3861.53,-51.53 3861.49,-51.49 3810,0 v1(3615,0)
SWCLK: P14.7 U10.22 | length 237.4
  Top Layer w6: U10.22 1460.88,-960 ccw(c1461.08,-954) 1461.08,-960 v1(1515,-960) ; v1(1550,-900) 1557.06,-892.41 cw(c1561.45,-896.5) 1561.19,-890.5 1633.8,-887.87 cw(c1633.98,-893.87) P14.7@1633.98,-887.87
  Bottom Layer w6: v1(1515,-960) v1(1550,-900)
SWDIO: P14.9 U10.25 | length 242.2
  Top Layer w6: U10.25 1486.88,-900 1517.51,-900 cw(c1517.51,-906) 1521.76,-901.76 1553.24,-933.24 ccw(c1557.48,-929) 1557.48,-935 P14.9
UP-RX: P7.1 U10.29 | length 1204.1
  Top Layer w6: U10.29 1469.01,-820.99 1488.03,-840 1545,-840 v1(1570,-865) ; v1@1565,-1230 1570,-1225 2031.49,-1225 2035,-1228.51 P7.1
  Bottom Layer w6: 1449.22,-979.22 cw(c1453.49,-975) 1449.22,-970.78 1553.26,-866.74 cw(c1557.49,-871) 1557.49,-865 v1(1570,-865) ; 1449.24,-979.24 1588.26,-1118.26 cw(c1584,-1122.49) 1590,-1122.49 1590,-1210 v1(1570,-1230)
V_BATT: C1.2 D2.A P2.2 U1.1 | length 637.1
  Top Layer w8: C1.2 U1.1
  Top Layer w10: D2.A@511.61,-265 562.07,-315.46 cw(c555,-322.53) 565,-322.53 565,-385 ccw(c620,-385) 620,-440 639.41,-440 639.41,-574.41 765,-700 P2.2
VA: C9.2 C10.1 C13.1 U3.5 U4.5 | length 335.2
  Top Layer w8: C13.1@3270.43,-279.84 U4.5
  Top Layer w10: C10.1@3102.4,-281.81 U3.5 ; C10.1 C9.2@3179.09,-284.41 ; C9.2 C13.1@3270.43,-283.5
VBUS: D3.A P13.1 | length 322.9
  Top Layer w6: D3.A 965,-1125 980,-1140 980,-1194 ccw(c986,-1194) 986,-1200 1096.44,-1200 cw(c1096.44,-1206) 1099.38,-1200.77 ccw(c1108.12,-1185.03) 1102.22,-1202.04 1113.82,-1213.64 P13.1
VCC: C30.2 C32.1 P8.1 P14.10 R8.2 R9.2 R10.2 U2.2 U9.5 U10.3 U10.7 U10.14 U10.21 U10.30 U10.48 | length 1188.5
  Top Layer w6: U9.5 203.19,-507.26 205.79,-504.66 205.79,-440.57 204.88,-439.66 v1(136.38,-439.66) ; v1(990,-660) 1010,-640 1055,-640 1062,-647 U10.48 ; v1(1040,-1182) 1094.11,-1171.92 ccw(c1092.99,-1166.03) 1098.97,-1166.54 1099.5,-1161 U10.3 ; U10.7 1180,-1170 1188.85,-1178.85 1200.69,-1178.85 1211.84,-1190 v1(1215,-1190) ; U10.14 1318,-1179.75 1325,-1186.75 v1(1325,-1190) ; v1(1410,-1400) R10.2 ; U10.21 1435.5,-979.5 1479.5,-979.5 v1(1480,-980) ; U10.30 1437.5,-804.5 1469.5,-804.5 1490,-825 1543,-825 v1(1565,-803) ; R8.2 R9.2 1856.54,-71.54 1875,-90 v1(1910,-90) ; P14.10 1820,-938.23 v1(1820,-1010) ; P14.10@1831.77,-935 P14.10@1842.88,-946.11
  Top Layer w10: v1(965,-85) U2.2
VCC1: C3.2 C4.1 P6.4 R4.1 U8.5 | length 1421.7
  Top Layer w6: 545,-1395 899.05,-1395 cw(c899.05,-1401) 903.29,-1396.76 R4.1 ; 554.06,-1385.94 556.54,-1383.46 563.11,-1383.46
  Top Layer w8: U8.5 120,-917.24 180,-917.24 182.24,-917.24 182.69,-917.66 185.89,-920.59 182.24,-920.59 C4.1
  Top Layer w15: C4.1@185.89,-920.59 224.41,-920.59 260,-956.18 260,-1350 305,-1395 545,-1395 554.06,-1385.94 ; 556.54,-1383.46 563.11,-1376.89 P6.4
VDDD: C8.1 C26.1 U4.30 U7.5 | length 177.2
  Top Layer w8: U4.30 C8.1@3430.47,-104.88
  Top Layer w10: C8.1 C26.1 ; C26.1@3426.18,-50.59 U7.5
VDDIO: C17.1 C20.2 C21.1 U4.20 U6.5 | length 348.2
  Top Layer w8: U4.20 3615.43,-279.84 C17.1 3685.59,-294.41 3710,-270 3710,-246.5 C20.2 3785.91,-236.5 3787.6,-238.19 U6.5
VH: C14.2 C15.1 P11.1 U5.5 | length 738
  Top Layer w8: U5.5 C15.1@3292.6,-1083.35
  Top Layer w12: P11.1 3015,-705 3015,-915 3183.35,-1083.35 C15.1@3292.6,-1083.35
VIN: C6.2 C7.1 C11.1 C16.1 C22.1 C25.1 C27.1 C31.1 D3.K P4.3 R1.2 U3.1 U5.1 U6.1 U7.1 U8.1 U9.1 U9.3 | length 10107.3
  Top Layer w6: -75,-530 -180,-635 -180,-1085 47.06,-1312.06 92.06,-1312.06 209.12,-1429.12 947.37,-1429.12 965,-1411.49 965,-1240.79 949.61,-1225.39 D3.K ; C31.1@-48.62,-509.07 C31.1@-46.81,-507.26 ; U9.3@12.68,-584.66 21.54,-584.66 U9.3 24.14,-694.23 ; 47.4,-703.45 52.4,-698.46
  Top Layer w8: C11.1 3110.59,24.41 ; U6.1 3787.6,-456.81 C22.1 3774.41,-514.41 3919.41,-514.41 3925,-520
  Top Layer w10: C6.2 760,-95 ; 765,-95 765,-90
  Top Layer w12: R1.2 771.54,-359.36 cw(c783.54,-359.41) 777.83,-348.85 cw(c791.15,-373.63) 785.57,-346.05 ccw(c767.51,-255.34) 860,-255.11 ; 820,-90 820,-152.25 ccw(c832,-152.17) 820.01,-152.69 827.78,-152.69 C7.1 cw(c823.32,-200.94) 860,-201.01 cw(c848,-201.11) 860,-201.11 860,-255.06 ; U3.1 C11.1@3102.4,-33.19 ; C16.1@3292.6,-1322.17 U5.1 ; U7.1 C25.1@3643.82,-50.59 ; C25.1 3639.41,20.59
  Top Layer w15: -75,-510 -74.07,-509.07 C31.1@-48.62,-509.07 ; C31.1@-46.81,-507.26 U9.1 ; 3294.41,-1384.41 C16.1
  Top Layer w20: U8.1 47.4,-753.78 C27.1 47.4,-746.22 47.4,-703.45 43.95,-700 -63.28,-700 -75,-688.28 -75,-530 -75,-510 -75,-210 110.89,-24.11 cw(c125,-38.28) 124.94,-18.28 125,-18.28 573.28,-18.28 585,-30 P4.3 765,-90 820,-90 855,-90 905,-40 960,-40 1024.18,24.18 cw(c1038.28,10) 1038.22,30 1038.28,30 3825,30 3925,-70 3925,-520 3925,-895 3425,-1395 3305,-1395 3294.41,-1384.41
VREF_OUT: U10.17 | length 128.8
  Top Layer w6: U10.17 1494.49,-1058 1498,-1061.51 v3@1498,-1123
  Top Layer w8: v3@1498,-1123 v3(1500,-1125)
VSENS: R1.1 R2.2 U10.63 | length 921.8
  Top Layer w6: v1(795,-800) 920,-675 920,-500 875,-455 R2.2 ; v1(830,-1040) 913.19,-1039.76 ccw(c913.22,-1033.76) 916.35,-1038.88 cw(c919.49,-1044) 919.49,-1038 U10.63
  Top Layer w10: R2.2 R1.1
  Bottom Layer w6: v1(795,-800) 795,-1005 v1(830,-1040)
pads on no net: P4.1 P5.3 P5.4 P6.0 P6.1 P6.8 P7.3 P7.4 P9.3 P9.4 P13. P13.4 P14.2 P14.3 P14.4 P14.5 U1.4 U2.1 U2.4 U2.5 U2.6 U2.7 U2.8 U2.9 U2.10 U2.11 U2.12 U4.2 U4.4 U4.6 U4.8 U4.9 U4.11 U4.12 U4.16 U4.17 U4.18 U4.19 U4.22 U4.28 U7.4 U10.1 U10.2 U10.8 U10.9 U10.10 U10.11 U10.12 U10.18 U10.23 U10.24 U10.26 U10.27 U10.39 U10.40 U10.41 U10.42 U10.43 U10.53 U10.54 U10.55 U10.56 U10.64
copper on no net: | length 90
  Top Layer w12: 2755,-355 2845,-355

## Polygon pours and split planes (outlines as drawn)
DGND on Internal Plane 1 (split plane): 2794.9,-1439.9 -214.9,-1439.9 -214.9,44.9 2794.9,44.9
AGND on Internal Plane 1 (split plane): 4269.9,-1439.9 2805.1,-1439.9 2805.1,44.9 4269.9,44.9
VCC on Internal Plane 2 (split plane): 2794.9,-1439.9 -214.9,-1439.9 -214.9,44.9 2794.9,44.9
VA on Internal Plane 2 (split plane): 4269.9,-1439.9 2805.1,-1439.9 2805.1,44.9 4269.9,44.9

## Other copper
Internal Plane 1 (plane layer: these items are gaps in the copper):
  lines w10: 2800,-1460 2800,65
Internal Plane 2 (plane layer: these items are gaps in the copper):
  lines w10: 2800,-1460 2800,65

## Silkscreen, mask and mechanical layers (free items; w line width, h text height)
Top Overlay:
  circle w20: c1145,25 r11.18
  circle w10: c995,-1120 r5
  lines w10: 240,-200 240,-376.81 261.61,-398.43 ; 840,-1300 955,-1300 ; 1475,-690 1595,-690 1595,-515 1475,-515 1475,-690
  text "OFF" at 50,-45 h120
  text "ON" at 730,-45 h120
  text "K" at 965,-195 h60
  text "K" at 295,-280 h60 r180
  text "-" at 910,-620 h60 r90
  text "1" at 2955,-645 h80 r90
  text "+" at 2975,-655 h80
  text "+" at 860,-735 h60
  text "3" at 2954.14,-747.46 h80 r90
  text "S" at 3020,-747.46 h80 r90
  text "-" at 3015,-840 h80 r90
  text "2" at 2955,-850 h80 r90
  text "DIO" at 1635,-999.56 h40
  text "V" at 1850.06,-1010 h60
  text "Loggerhead" at 3465,-1240 h100
  text "K" at 970,-1255 h60
  text "Snap4.0" at 3505,-1390 h150
  text "UP" at 1775,-1440 h120
  text "DOWN" at 2165,-1440 h120
  text "ENTER" at 2635,-1440 h120
Bottom Overlay:
  text "-" at 1720,-240 h100
  text "+" at 2790,-1275 h100
Mechanical 1:
  the board outline again, w10

## Text inside footprints (layer, text, board x,y; h text height)
C3: Top Overlay "+" at 130,-955 h19.68 r270
C6: Top Overlay "+" at 725,-150 h19.68 r90
C9: Top Overlay "+" at 3170,-250 h19.68 r90
C14: Top Overlay "+" at 3235,-1115 h19.68 r270
C20: Top Overlay "+" at 3730,-270 h19.68 r270
C30: Top Overlay "+" at 175,-460 h19.68 r180